# Altium PCB PCB1.PcbDoc (part 2 of 2)
Units mm, origin at the board's own origin, x right, y up, seen from the top; angles counter-clockwise.
Board outline 53 x 53 mm, 4 copper layers (Top Layer, Internal Plane 1, Signal Layer 1, Bottom Layer), stack 1.58 mm thick; 86 components, 52 nets, 310 pads, 1237 vias.
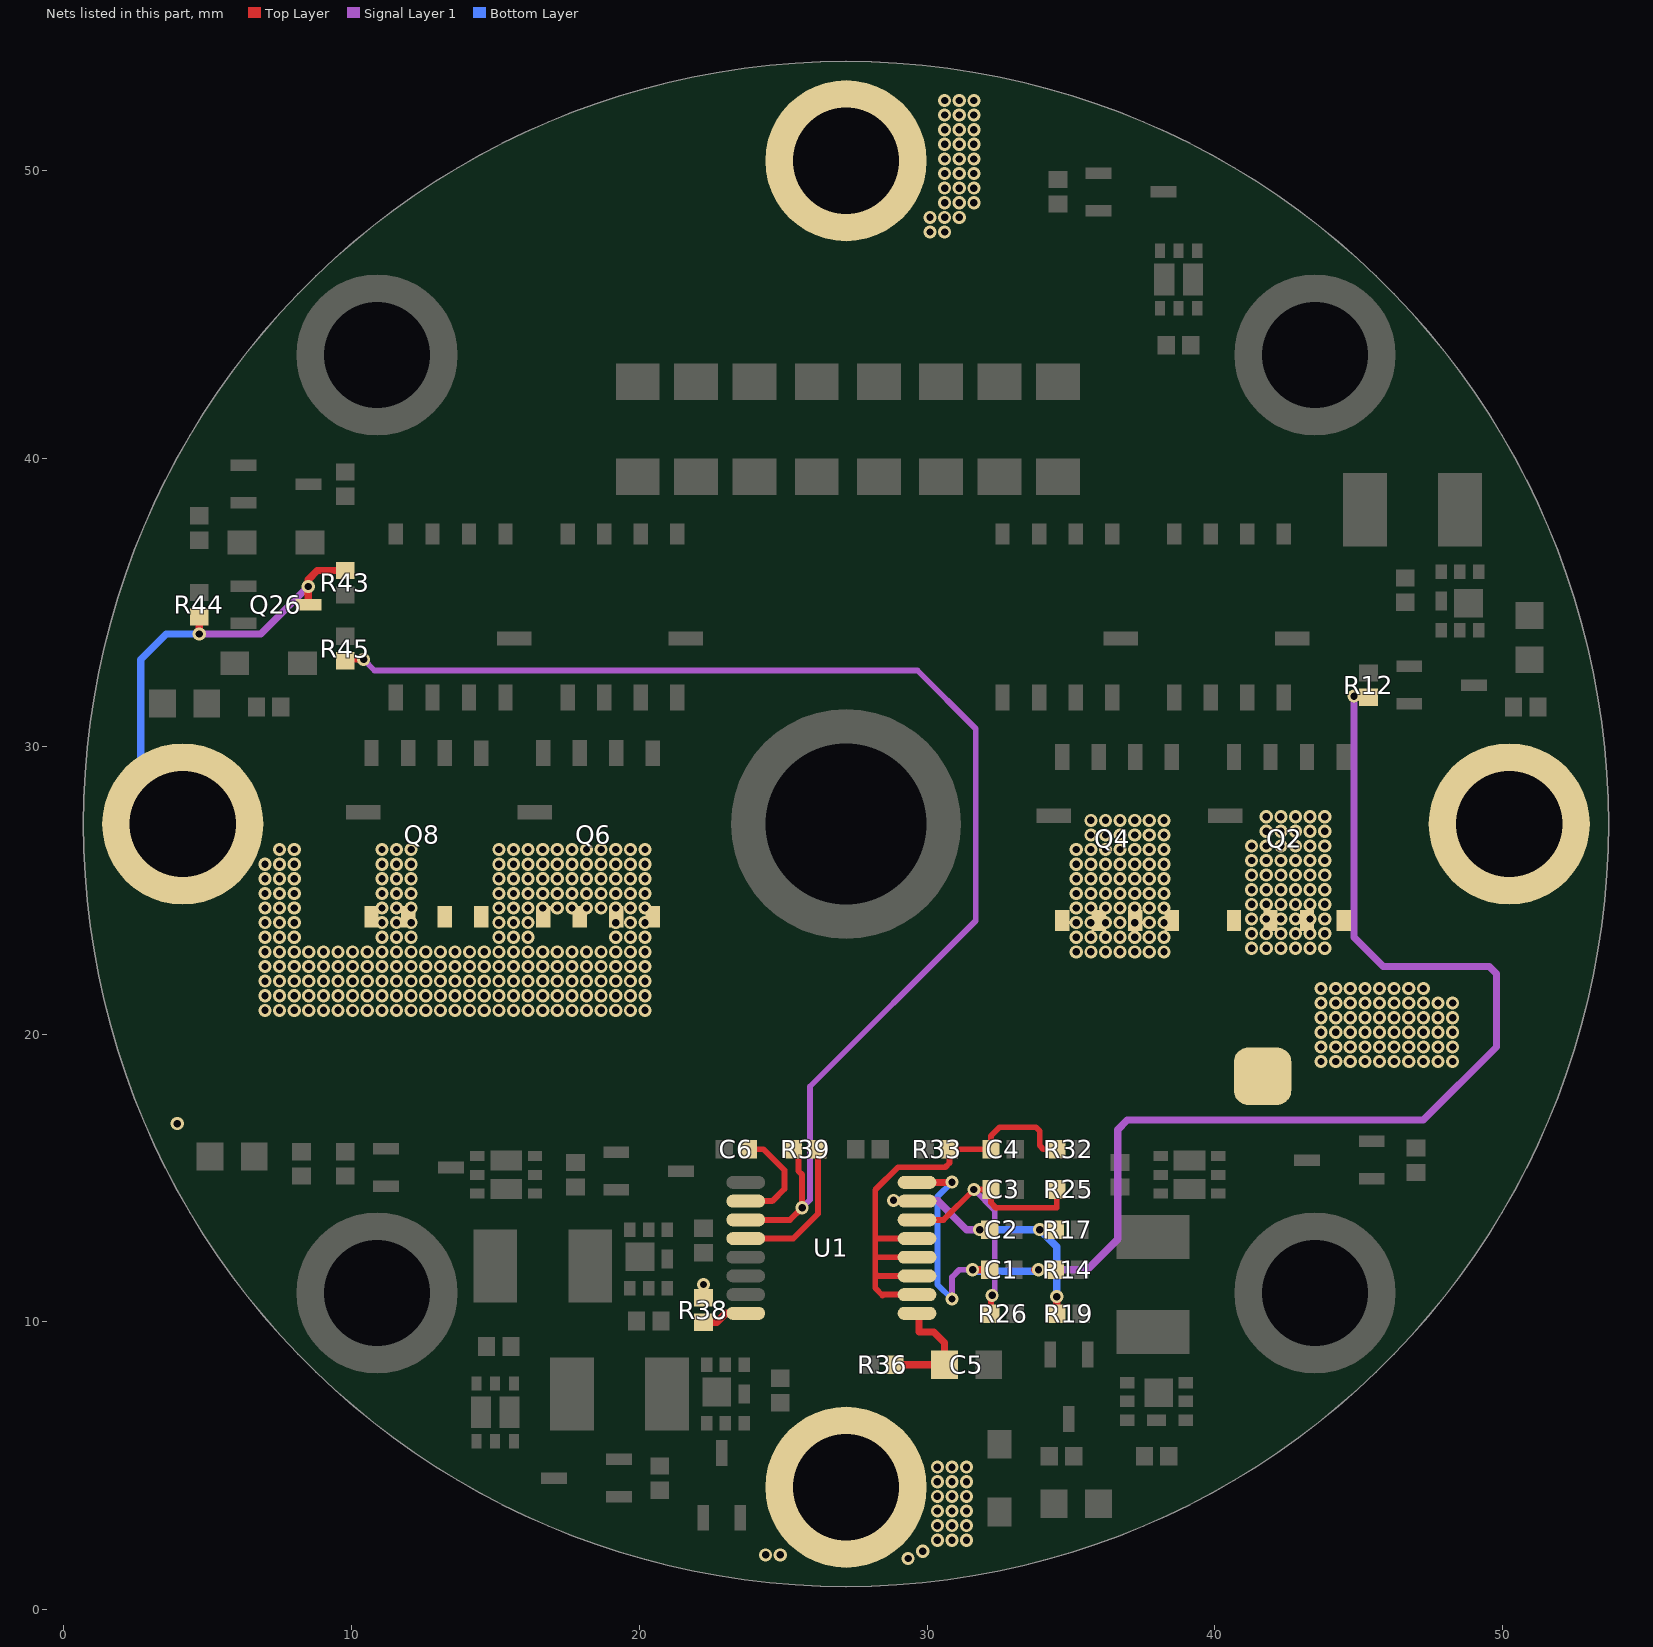
[diagram p4: the nets of this part, all layers, seen from the top]

## Via types
v1: diameter 0.457, hole 0.254, Top Layer to Bottom Layer, tented both sides, 1237 vias

## Nets (pads, with @x,y where several pads share a name; then routed paths per layer and width w, separated by ;. In a path a pad name is that pad's centre, name@x,y a point inside that pad or via, vN(x,y) a via of type N, cw(c..) or ccw(c..) an arc to the next point about the centre after c; other vN are vias at no path point) (continued)
P-: pad.1@4.128,27.305 pad.1@27.178,4.255 pad.1@27.178,50.355 pad.1@50.228,27.305 pad.2 Q2.1 Q2.2 Q2.3 Q2.4 Q4.1 Q4.2 Q4.3 Q4.4 Q6.1 Q6.2 Q6.3 Q6.4 Q8.1 Q8.2 Q8.3 Q8.4 Q26.3 R38.1 R43.2 R44.2 | length 16.5
  Top Layer w0.254: v1(4.699,33.909) R44.2@4.699,34.5 ; Q26.3@8.491,34.925 v1(8.491,35.56) 8.491,35.796 8.807,36.112 R43.2@9.779,36.112 ; R38.1@22.225,10.839 v1(22.225,11.303)
  Signal Layer 1 w0.254: v1(4.699,33.909) 6.84,33.909 v1(8.491,35.56)
  Bottom Layer w0.254: pad.1@4.128,27.305 2.667,28.766 2.667,33.02 3.556,33.909 v1(4.699,33.909)
  other v1: 29.337,1.778 24.384,1.905 24.892,1.905 29.845,2.032 30.353,2.413 30.861,2.413 31.369,2.413 30.353,2.921 30.861,2.921 31.369,2.921 30.353,3.429 30.861,3.429 31.369,3.429 30.353,3.937 30.861,3.937 31.369,3.937 30.353,4.445 30.861,4.445 31.369,4.445 30.353,4.953 30.861,4.953 31.369,4.953 3.937,16.891 43.688,19.05 44.196,19.05 44.704,19.05 45.212,19.05 45.72,19.05 46.228,19.05 46.736,19.05 47.244,19.05 47.752,19.05 48.26,19.05 43.688,19.558 44.196,19.558 44.704,19.558 45.212,19.558 45.72,19.558 46.228,19.558 46.736,19.558 47.244,19.558 47.752,19.558 48.26,19.558 43.688,20.066 44.196,20.066 44.704,20.066 45.212,20.066 45.72,20.066 46.228,20.066 46.736,20.066 47.244,20.066 47.752,20.066 47.752,20.066 48.26,20.066 43.688,20.574 44.196,20.574 44.704,20.574 45.212,20.574 45.72,20.574 46.228,20.574 46.736,20.574 47.244,20.574 47.752,20.574 48.26,20.574 6.985,20.828 7.493,20.828 8.001,20.828 8.509,20.828 9.017,20.828 9.525,20.828 10.033,20.828 10.541,20.828 11.049,20.828 11.557,20.828 12.065,20.828 12.573,20.828 13.081,20.828 13.589,20.828 14.097,20.828 14.605,20.828 15.113,20.828 15.621,20.828 16.129,20.828 16.637,20.828 17.145,20.828 17.653,20.828 18.161,20.828 18.669,20.828 19.177,20.828 19.685,20.828 20.193,20.828 43.688,21.082 44.196,21.082 44.704,21.082 45.212,21.082 45.72,21.082 46.228,21.082 46.736,21.082 47.244,21.082 47.752,21.082 48.26,21.082 6.985,21.336 7.493,21.336 8.001,21.336 8.509,21.336 9.017,21.336 9.525,21.336 10.033,21.336 10.541,21.336 11.049,21.336 11.557,21.336 12.065,21.336 12.573,21.336 13.081,21.336 13.589,21.336 14.097,21.336 14.605,21.336 15.113,21.336 15.621,21.336 16.129,21.336 16.637,21.336 17.145,21.336 17.653,21.336 18.161,21.336 18.669,21.336 19.177,21.336 19.685,21.336 20.193,21.336 43.688,21.59 44.196,21.59 44.704,21.59 45.212,21.59 45.72,21.59 46.228,21.59 46.736,21.59 47.244,21.59 6.985,21.844 7.493,21.844 8.001,21.844 8.509,21.844 9.017,21.844 9.525,21.844 10.033,21.844 10.541,21.844 11.049,21.844 11.557,21.844 12.065,21.844 12.573,21.844 13.081,21.844 13.589,21.844 14.097,21.844 14.605,21.844 15.113,21.844 15.621,21.844 16.129,21.844 16.637,21.844 17.145,21.844 17.653,21.844 18.161,21.844 18.669,21.844 19.177,21.844 19.685,21.844 20.193,21.844 6.985,22.352 7.493,22.352 8.001,22.352 8.509,22.352 9.017,22.352 9.525,22.352 10.033,22.352 10.541,22.352 11.049,22.352 11.557,22.352 12.065,22.352 12.573,22.352 13.081,22.352 13.589,22.352 14.097,22.352 14.605,22.352 15.113,22.352 15.621,22.352 16.129,22.352 16.637,22.352 17.145,22.352 17.653,22.352 18.161,22.352 18.669,22.352 19.177,22.352 19.685,22.352 20.193,22.352 6.985,22.86 7.493,22.86 8.001,22.86 8.509,22.86 9.017,22.86 9.525,22.86 10.033,22.86 10.541,22.86 11.049,22.86 11.557,22.86 12.065,22.86 12.573,22.86 13.081,22.86 13.589,22.86 14.097,22.86 14.605,22.86 15.113,22.86 15.621,22.86 16.129,22.86 16.637,22.86 17.145,22.86 17.653,22.86 18.161,22.86 18.669,22.86 19.177,22.86 19.685,22.86 20.193,22.86 35.179,22.86 35.687,22.86 36.195,22.86 36.703,22.86 37.211,22.86 37.719,22.86 38.227,22.86 41.275,22.987 41.783,22.987 42.291,22.987 42.799,22.987 43.307,22.987 43.815,22.987 6.985,23.368 7.493,23.368 8.001,23.368 11.049,23.368 11.557,23.368 12.065,23.368 15.113,23.368 15.621,23.368 16.129,23.368 19.177,23.368 19.685,23.368 20.193,23.368 35.179,23.368 35.687,23.368 36.195,23.368 36.703,23.368 37.211,23.368 37.719,23.368 38.227,23.368 41.275,23.495 41.783,23.495 42.291,23.495 42.799,23.495 43.307,23.495 43.815,23.495 6.985,23.876 7.493,23.876 8.001,23.876 11.049,23.876 11.557,23.876 12.065,23.876 15.113,23.876 15.621,23.876 16.129,23.876 19.177,23.876 19.685,23.876 20.193,23.876 35.179,23.876 35.687,23.876 36.195,23.876 36.703,23.876 37.211,23.876 37.719,23.876 38.227,23.876 41.275,24.003 41.783,24.003 42.291,24.003 42.799,24.003 43.307,24.003 43.815,24.003 6.985,24.384 7.493,24.384 8.001,24.384 11.049,24.384 11.557,24.384 12.065,24.384 15.113,24.384 15.621,24.384 16.129,24.384 16.637,24.384 17.145,24.384 17.653,24.384 18.161,24.384 18.669,24.384 19.177,24.384 19.685,24.384 20.193,24.384 35.179,24.384 35.687,24.384 36.195,24.384 36.703,24.384 37.211,24.384 37.719,24.384 38.227,24.384 41.275,24.511 41.783,24.511 42.291,24.511 42.799,24.511 43.307,24.511 43.815,24.511 6.985,24.892 7.493,24.892 8.001,24.892 11.049,24.892 11.557,24.892 12.065,24.892 15.113,24.892 15.621,24.892 16.129,24.892 16.637,24.892 17.145,24.892 17.653,24.892 18.161,24.892 18.669,24.892 19.177,24.892 19.685,24.892 20.193,24.892 35.179,24.892 35.687,24.892 36.195,24.892 36.703,24.892 37.211,24.892 37.719,24.892 38.227,24.892 41.275,25.019 41.783,25.019 42.291,25.019 42.799,25.019 43.307,25.019 43.815,25.019 6.985,25.4 7.493,25.4 8.001,25.4 11.049,25.4 11.557,25.4 12.065,25.4 15.113,25.4 15.621,25.4 16.129,25.4 16.637,25.4 17.145,25.4 17.653,25.4 18.161,25.4 18.669,25.4 19.177,25.4 19.685,25.4 20.193,25.4 35.179,25.4 35.687,25.4 36.195,25.4 36.703,25.4 37.211,25.4 37.719,25.4 38.227,25.4 41.275,25.527 41.783,25.527 42.291,25.527 42.799,25.527 43.307,25.527 43.815,25.527 6.985,25.908 7.493,25.908 8.001,25.908 11.049,25.908 11.557,25.908 12.065,25.908 15.113,25.908 15.621,25.908 16.129,25.908 16.637,25.908 17.145,25.908 17.653,25.908 18.161,25.908 18.669,25.908 19.177,25.908 19.685,25.908 20.193,25.908 35.179,25.908 35.687,25.908 36.195,25.908 36.703,25.908 37.211,25.908 37.719,25.908 38.227,25.908 41.275,26.035 41.783,26.035 42.291,26.035 42.799,26.035 43.307,26.035 43.815,26.035 7.493,26.416 8.001,26.416 11.049,26.416 11.557,26.416 12.065,26.416 15.113,26.416 15.621,26.416 16.129,26.416 16.637,26.416 17.145,26.416 17.653,26.416 18.161,26.416 18.669,26.416 19.177,26.416 19.685,26.416 20.193,26.416 35.179,26.416 35.687,26.416 36.195,26.416 36.703,26.416 37.211,26.416 37.719,26.416 38.227,26.416 41.275,26.543 41.783,26.543 42.291,26.543 42.799,26.543 43.307,26.543 43.815,26.543 35.687,26.924 36.195,26.924 36.703,26.924 36.703,26.924 37.211,26.924 37.719,26.924 38.227,26.924 41.783,27.051 42.291,27.051 42.799,27.051 42.799,27.051 43.307,27.051 43.815,27.051 35.687,27.432 36.195,27.432 36.703,27.432 37.211,27.432 37.719,27.432 38.227,27.432 41.783,27.559 42.291,27.559 42.799,27.559 43.307,27.559 43.815,27.559 30.099,47.879 30.607,47.879 30.099,48.387 30.607,48.387 31.115,48.387 30.607,48.895 31.115,48.895 31.623,48.895 30.607,49.403 31.115,49.403 31.623,49.403 30.607,49.911 31.115,49.911 31.623,49.911 30.607,50.419 31.115,50.419 31.623,50.419 30.607,50.927 31.115,50.927 31.623,50.927 30.607,51.435 31.115,51.435 31.623,51.435 30.607,51.943 31.115,51.943 31.623,51.943 30.607,52.451 31.115,52.451 31.623,52.451
RTS: R39.1 R45.2 U1.11 | length 46.3
  Top Layer w0.203: R45.2@9.779,33.02 v1(10.414,33.02) ; U1.11@23.695,13.548 25.232,13.548 v1(25.654,13.97) 25.654,15.113 25.527,15.24 25.527,15.831 R39.1@25.356,16.002
  Signal Layer 1 w0.203: v1(10.414,33.02) 10.795,32.639 29.666,32.639 31.689,30.616 31.689,23.942 25.928,18.181 25.928,14.244 v1(25.654,13.97)
RTV: R39.2 U1.12 | length 5.1
  Top Layer w0.203: U1.12@23.695,12.898 25.344,12.898 26.206,13.76 R39.2@26.206,16.002
TEC: C6.2 U1.10 | length 3.7
  Top Layer w0.203: U1.10@23.695,14.198 24.612,14.198 25.039,14.625 25.039,15.27 24.307,16.002 C6.2@23.793,16.002
VC1: C4.2 R32.1 R33.1 U1.2 U1.3 U1.4 U1.5 | length 17.8
  Top Layer w0.203: U1.2@29.645,10.948 28.474,10.948 28.448,10.922 28.194,11.176 28.194,11.684 ; U1.3@29.645,11.598 28.28,11.598 28.194,11.684 ; U1.4@29.645,12.248 28.25,12.248 28.194,12.192 ; U1.5@29.645,12.898 28.25,12.898 28.194,12.954 ; R32.1@34.5,16.002 34.036,16.002 33.909,16.129 33.909,16.637 33.782,16.764 32.512,16.764 32.214,16.466 C4.2@32.214,16.002 R33.1@30.778,16.002 30.778,15.523 30.632,15.377 28.982,15.377 28.194,14.589 28.194,12.954 ; 28.194,11.684 28.194,12.192 ; 28.194,12.192 28.194,12.954
VC2: C3.2 R25.1 R26.1 U1.6 | length 11.1
  Top Layer w0.203: U1.6@29.645,13.548 30.566,13.548 v1(31.623,14.605) C3.2@32.214,14.605 32.214,14.141 32.385,13.97 34.5,13.97 R25.1@34.5,14.605 ; R26.1@32.214,10.287 32.214,10.878 v1(32.258,10.922)
  Signal Layer 1 w0.203: v1(31.623,14.605) 32.349,13.879 32.349,11.013 v1(32.258,10.922)
VC3: C2.2 R17.1 R19.1 U1.7 | length 10.1
  Top Layer w0.254: v1(28.829,14.224) 28.855,14.198 U1.7@29.645,14.198 ; v1(33.909,13.208) R17.1@34.456,13.208 ; R19.1@34.5,10.287 v1(34.5,10.878) v1@34.544,10.922
  Signal Layer 1 w0.254: v1(28.829,14.224) 30.353,14.224 31.369,13.208 v1(31.821,13.208)
  Bottom Layer w0.254: v1(31.821,13.208) v1(33.909,13.208) 34.5,12.617 v1(34.5,10.878)
VC4: C1.2 R12.1 R14.1 U1.8 | length 49.2
  Top Layer w0.254: U1.8@29.645,14.848 30.85,14.848 v1(30.861,14.859) ; v1(31.579,11.811) C1.2@32.17,11.811 ; v1@33.738,11.811 R14.1@34.456,11.811 ; v1(44.831,31.75) 44.875,31.706 R12.1@45.339,31.706
  Signal Layer 1 w0.203: v1(30.861,10.795) 30.861,11.557 31.115,11.811 v1(31.579,11.811)
  Signal Layer 1 w0.254: v1(33.865,11.811) 35.56,11.811 36.622,12.873 36.622,16.683 36.957,17.018 47.244,17.018 49.784,19.558 49.784,22.098 49.53,22.352 45.847,22.352 44.831,23.368 v1(44.831,31.75)
  Bottom Layer w0.203: v1(30.861,10.795) 30.353,11.303 30.353,14.351 v1(30.861,14.859)
  Bottom Layer w0.254: v1(31.579,11.811) 31.625,11.765 33.819,11.765 v1(33.865,11.811)
VCC: C5.2 R36.2 U1.1 | length 4.2
  Top Layer w0.254: R36.2@28.873,8.509 C5.2@30.599,8.509 30.599,9.279 30.226,9.652 29.718,9.652 29.718,10.225 U1.1@29.645,10.298
VM: R38.2 U1.16 | length 1.6
  Top Layer w0.254: R38.2@22.225,9.989 22.689,9.989 22.998,10.298 U1.16@23.695,10.298

## Polygon pours and split planes (outlines as drawn)
CELL4 on Top Layer "Component Side-No Net 1" (solid, remove dead copper, pour order 156): 31.75,33.147 31.75,23.876 30.861,22.987 30.607,22.733 24.257,22.733 22.84,24.15 22.733,24.257 22.733,33.274 31.75,33.274
P- on Top Layer "Component Side-No Net 1" (solid, remove dead copper, pour order 155): 44.958,25.146 45.339,25.781 45.339,30.734 49.69,30.734 49.765,30.809 51.054,29.52 51.054,22.606
NetQ5_5 on Top Layer "Component Side-No Net 1" (solid, remove dead copper, pour order 154): 10.033,28.696 22.6,28.696 22.606,28.702 22.606,32.258 10.481,32.258 9.994,31.771
NetQ1_5 on Top Layer "Component Side-No Net 1" (solid, remove dead copper, pour order 153): 32.131,32.639 43.815,32.639 43.942,32.512 43.838,32.408 43.838,30.965 44.196,30.607 45.212,30.607 45.212,28.194 45.085,28.321 32.131,28.321
GND on Top Layer "Component Side-No Net 1" (solid, remove dead copper, pour order 152): 61.595,27.686 49.784,27.686 47.117,30.353 46.863,30.607 44.196,30.607 43.815,30.988 43.815,34.544 42.545,34.544 42.418,34.671 42.037,35.052 35.56,35.052 35.56,41.656 35.179,42.037 34.29,42.926 29.972,42.926 29.972,56.642 31.623,58.293 31.75,58.42 67.691,58.42
GND on Top Layer "Component Side-No Net 1" (solid, remove dead copper, pour order 151): -1.651,48.895 0.127,47.117 13.589,47.117 13.589,41.275 12.573,40.259 12.319,40.005 -4.953,40.005
P- on Top Layer "Component Side-No Net 1" (solid, remove dead copper, pour order 150): -3.175,43.18 -1.397,41.402 11.684,41.402 11.684,33.909 10.922,33.147 10.541,32.766 10.541,31.496 10.541,30.607 10.033,30.099 10.033,26.797 -2.921,30.099 -3.175,30.353
P- on Top Layer "Component Side-No Net 1" (solid, remove dead copper, pour order 149): 41.656,18.923 41.656,13.97 42.291,13.335 54.864,13.335 54.864,17.145 58.293,20.574
P- on Top Layer "Component Side-No Net 1" (solid, remove dead copper, pour order 93): -1.143,18.034 -1.016,17.907 53.721,17.907 53.721,4.191 51.308,1.778 44.323,-5.207 0.127,-5.207
GND on Top Layer "Component Side-No Net 1" (solid, remove dead copper, pour order 95): -6.731,19.304 60.325,19.304 61.849,17.78 61.468,17.399 61.468,-3.556 -13.462,-3.556 -15.494,-5.588
P- on Top Layer "Component Side-No Net 1" (solid, remove dead copper, pour order 148): 32.385,54.864 32.385,46.99 32.258,46.863 24.257,46.863 24.257,47.498 22.987,48.768 22.987,55.118
P- on Top Layer "Component Side-No Net 1" (solid, remove dead copper, pour order 139): 23.876,-0.508 24.13,-0.254 24.13,7.493 30.226,7.493 31.967,5.752 32.004,5.715 32.004,-0.762
16V8 on Top Layer "Component Side-No Net 1" (solid, remove dead copper, pour order 138): 13.97,9.948 14.257,10.235 17.272,10.235 16.891,10.616 16.891,14.097 16.891,14.59 16.368,15.113 12.319,15.113 12.319,13.97 12.192,13.843 12.954,13.081 12.954,12.954
12V on Top Layer "Component Side-No Net 1" (solid, remove dead copper, pour order 137): 16.764,10.033 18.161,10.033 18.542,10.414 20.193,10.414 20.193,8.197 20.066,8.07 20.066,7.874 18.669,7.874 18.034,7.239 17.78,7.493 17.653,7.493
BALDN1 on Top Layer "Component Side-No Net 1" (solid, remove dead copper, pour order 136): 17.272,13.843 20.701,13.843 20.574,13.716 20.574,10.795 20.574,10.527 20.643,10.458 20.599,10.414 18.542,10.414 18.542,10.033 17.272,10.033
12V on Top Layer "Component Side-No Net 1" (solid, remove dead copper, pour order 133): 20.701,11.811 21.717,11.811 21.717,14.224 21.59,14.351 20.701,14.351
NetQ21_1 on Top Layer "Component Side-No Net 1" (solid, remove dead copper, pour order 130): 16.129,14.859 17.018,14.859 17.145,14.986 18.161,14.986 18.161,13.843 16.129,13.843
NetQ21_1 on Top Layer "Component Side-No Net 1" (solid, remove dead copper, pour order 129): 12.954,15.621 14.732,15.621 14.732,17.018 12.954,17.018
CELL4 on Top Layer "Component Side-No Net 1" (solid, remove dead copper, pour order 128): 14.732,15.24 14.732,17.018 16.764,17.018 16.764,15.367 16.002,15.367 16.002,15.24
12V on Top Layer "Component Side-No Net 1" (solid, remove dead copper, pour order 126): 15.113,7.493 16.51,7.493 16.637,7.62 16.764,7.747 16.764,10.033 18.542,10.033 18.542,5.969 18.542,5.207 15.748,5.207 15.48,5.207 15.118,5.569
NetQ20_3 on Top Layer "Component Side-No Net 1" (solid, remove dead copper, pour order 125): 23.241,6.096 23.241,9.271 23.368,9.398 20.574,9.398 20.066,9.398 20.066,6.096
7V4 on Top Layer "Component Side-No Net 1" (solid, remove dead copper, pour order 124): 25.781,7.747 24.13,7.747 24.13,6.985 23.368,6.985 23.368,9.398 25.019,9.398
7V4 on Top Layer "Component Side-No Net 1" (solid, remove dead copper, pour order 123): 24.511,7.747 26.416,7.747 26.67,8.001 26.67,9.398 24.638,9.398 24.511,9.271
NetQ17_1 on Top Layer "Component Side-No Net 1" (solid, remove dead copper, pour order 120): 15.367,7.62 15.367,8.509 15.367,8.636 15.24,8.763 15.24,9.652 16.637,9.652 16.637,7.62
NetQ17_1 on Top Layer "Component Side-No Net 1" (solid, remove dead copper, pour order 119): 13.589,6.223 14.605,6.223 14.605,5.461 14.986,5.461 15.875,4.572 16.002,4.445 16.002,2.54 10.668,2.54 10.16,3.048
CELL3 on Top Layer "Component Side-No Net 1" (solid, remove dead copper, pour order 118): 4.572,14.097 12.319,14.097 13.97,12.446 13.97,8.382 14.097,8.255 14.351,8.255 14.732,8.255 14.732,7.493 14.859,7.493 14.859,6.223 13.962,6.223 12.79,5.051 12.565,4.826 7.747,4.826
7V4 on Top Layer "Component Side-No Net 1" (solid, remove dead copper, pour order 116): 35.941,12.065 35.941,10.795 37.846,10.795 37.973,10.795 38.1,10.922 38.1,12.573 35.941,12.573
NetQ16_3 on Top Layer "Component Side-No Net 1" (solid, remove dead copper, pour order 115): 36.449,10.541 39.243,10.541 39.243,6.985 36.449,6.985
3V7 on Top Layer "Component Side-No Net 1" (solid, remove dead copper, pour order 112): 37.592,6.858 37.592,5.969 37.719,5.842 37.973,5.842 37.973,3.429 38.1,3.302 38.481,2.921 38.481,2.286 42.545,2.286 43.307,3.048 41.783,4.572 40.132,4.572 40.132,6.731 40.005,6.858
7V4 on Top Layer "Component Side-No Net 1" (solid, remove dead copper, pour order 111): 39.864,14.097 39.497,14.097 39.497,12.065 35.941,12.065 35.941,13.97 36.322,14.351 36.81,14.839 37.043,14.839 38.207,14.839 38.354,14.986 38.481,15.113 39.902,15.113
NetQ13_1 on Top Layer "Component Side-No Net 1" (solid, remove dead copper, pour order 108): 38.354,15.494 37.211,15.494 37.211,17.018 37.338,17.145 37.39,17.197 38.354,17.197
NetQ13_1 on Top Layer "Component Side-No Net 1" (solid, remove dead copper, pour order 107): 39.751,14.732 40.767,14.732 40.767,12.446 39.751,12.446
CELL2 on Top Layer "Component Side-No Net 1" (solid, remove dead copper, pour order 106): 45.339,7.493 42.037,7.493 40.64,8.89 40.64,12.573 40.64,15.367 39.878,15.367 39.751,15.367 39.624,15.24 38.608,15.24 38.481,15.367 38.481,17.526 42.164,17.526 42.291,17.399 42.291,17.018 42.545,16.764 42.545,14.732 42.545,14.605 42.799,14.351 42.926,14.224 45.847,14.224 50.927,14.224 51.816,13.335 51.816,6.604
NetQ12_3 on Top Layer "Component Side-No Net 1" (solid, remove dead copper, pour order 104): 47.625,39.624 47.627,39.626 50.653,39.626 51.56,39.626 52.07,39.116 52.324,38.862 52.324,36.195 52.324,35.814 52.451,35.687 49.911,35.687 49.657,35.433 49.53,35.306 49.53,33.782 48.26,33.782 48.26,36.322 48.006,36.576 47.625,36.576
GND on Top Layer "Component Side-No Net 1" (solid, remove dead copper, pour order 103): 46.101,35.433 47.244,35.433 47.371,35.56 48.133,35.56 48.133,33.655 48.133,33.147 44.831,33.147 44.323,33.147 44.323,34.925 46.101,34.925
3V7 on Top Layer "Component Side-No Net 1" (solid, remove dead copper, pour order 102): 45.974,39.624 45.974,35.179 44.323,35.179 44.323,39.624
3V7 on Top Layer "Component Side-No Net 1" (solid, remove dead copper, pour order 100): 38.608,45.593 38.608,46.736 38.608,46.863 38.227,46.863 38.227,47.879 36.322,47.879 35.814,47.879 35.814,45.593
NetQ9_1 on Top Layer "Component Side-No Net 1" (solid, remove dead copper, pour order 98): 38.354,45.466 38.354,44.704 38.735,44.323 38.735,43.561 37.338,43.561 37.338,45.466
NetQ9_1 on Top Layer "Component Side-No Net 1" (solid, remove dead copper, pour order 97): 39.116,46.99 40.513,46.99 40.513,48.514 39.116,48.514
CELL1 on Top Layer "Component Side-No Net 1" (solid, remove dead copper, pour order 96): 38.862,46.736 38.862,45.593 39.116,45.593 39.21,45.499 39.21,45.054 39.21,44.864 39.37,44.704 39.751,44.704 39.751,41.529 40.259,41.021 40.64,40.64 44.577,40.64 44.704,40.64 48.641,44.577 48.641,47.117 48.514,47.244 48.133,46.863 39.624,46.863 38.862,46.863
IS on Top Layer "Component Side-No Net 1" (solid, remove dead copper, pour order 94): 11.176,33.274 11.176,39.243 11.176,40.259 11.303,40.132 22.606,40.132 42.291,40.132 42.672,39.751 42.672,35.052 42.672,34.426 42.648,34.402 42.633,34.417 37.846,34.417 35.644,34.417 35.629,34.402 35.629,33.452 23.317,33.452 22.352,34.417 22.337,34.402 20.516,34.402 20.516,33.452 17.256,33.452 17.256,34.401 17.272,34.417 17.257,34.402 14.547,34.402 14.547,33.343 14.478,33.274
GND on Top Layer "Component Side-No Net 1" (solid, remove dead copper, pour order 92): 8.001,45.847 8.001,42.164 8.001,42.037 9.271,40.767 9.398,40.64 12.446,40.64 35.179,40.64 35.433,40.894 35.433,46.99 35.179,47.244 29.083,47.244 25.146,47.244 23.876,48.514 23.876,54.229 8.382,54.229 8.255,54.356
P- on Top Layer "Component Side-No Net 1" (solid, remove dead copper, pour order 91): 41.46,27.889 47.676,27.889 47.752,27.813 48.006,27.559 48.006,22.225 42.291,22.225 41.529,21.463
P- on Top Layer "Component Side-No Net 1" (solid, remove dead copper, pour order 90): 22.84,24.15 22.84,26.944 21.717,28.067 18.415,28.067 18.161,28.067 18.034,27.94 17.907,27.813 17.907,25.146 17.907,20.32 17.78,20.193 18.542,19.431 22.606,19.431
P- on Top Layer "Component Side-No Net 1" (solid, remove dead copper, pour order 89): 0.889,30.226 6.223,30.226 8.763,30.226 9.398,29.591 9.525,29.464 9.525,27.178 11.376,27.178 11.6,27.178 19.812,27.178 22.098,27.178 22.479,26.797 22.733,26.543 22.733,25.146 22.733,24.257 23.495,23.495 24.257,22.733 30.734,22.733 30.988,22.733 31.75,23.368 31.75,23.876 31.75,26.924 32.258,26.924 32.639,26.924 45.72,26.924 45.847,26.924 47.117,28.194 47.117,29.718 47.117,30.353 47.371,30.607 56.388,30.607 56.388,17.78 55.753,17.145 55.499,17.399 41.402,17.399 -1.778,17.399 -2.921,18.542 -2.667,18.796 -2.667,29.591
12V on Bottom Layer "Component Side-No Net 1" (solid, remove dead copper, pour order 173): 21.717,12.192 21.717,16.891 21.844,17.018 17.78,17.018 17.78,12.446 17.907,12.319 17.907,12.192
7V4 on Bottom Layer "Component Side-No Net 1" (solid, remove dead copper, pour order 114): 24.13,12.192 37.592,12.192 37.719,12.065 38.227,11.557 38.227,7.62 31.877,7.62 31.369,7.112 31.242,7.239 23.368,7.239
NetQ5_5 on Bottom Layer "Component Side-No Net 1" (solid, remove dead copper, pour order 169): 8.763,27.432 23.622,27.432 23.749,27.559 23.622,27.686 23.622,33.782 9.144,33.782 9.017,33.909
P- on Bottom Layer "Component Side-No Net 1" (solid, remove dead copper, pour order 168): 22.352,27.888 22.225,28.015 22.225,34.036 47.371,34.036 49.276,32.131 48.514,31.369 48.514,25.019 47.752,25.019 46.355,23.622 21.336,23.622
3V7 on Bottom Layer "Component Side-No Net 1" (solid, remove dead copper, pour order 167): 44.45,37.338 46.609,37.338 46.482,37.211 46.482,34.798 44.196,34.798 44.069,34.925
GND on Bottom Layer "Component Side-No Net 1" (solid, remove dead copper, pour order 166): -2.286,30.988 -1.686,31.588 10.688,31.588 10.795,31.695 10.795,33.02 11.049,33.02 11.303,33.274 11.43,33.401 11.43,40.005 36.393,40.005 42.672,33.726 45.212,31.186 45.212,30.585 55.604,30.585 56.388,31.369 54.356,33.401 54.356,61.087 3.937,61.087 0.635,64.389 -6.604,57.15 -6.731,57.15
P- on Bottom Layer "Component Side-No Net 1" (solid, remove dead copper, pour order 165): -7.62,34.417 6.477,34.417 8.763,32.131 9.017,31.877 10.414,31.877 36.576,31.877 40.386,28.067 40.513,28.194 42.672,28.194 44.577,28.194 44.704,28.067 45.085,28.448 45.085,30.458 45.212,30.585 45.234,30.607 63.246,30.607 63.246,17.018 64.262,16.002 64.135,15.875 -21.59,15.875
CELL4 on Bottom Layer "Component Side-No Net 1" (solid, remove dead copper, pour order 164): 22.352,31.496 23.241,32.385 31.369,32.385 32.258,31.496 32.258,28.194 31.877,27.813 31.75,27.686 31.75,23.876 31.75,23.749 30.861,22.86 30.734,22.987 24.384,22.987 24.257,22.987 22.987,24.257 22.987,26.924 22.987,27.559 22.352,28.194
IS on Bottom Layer "Component Side-No Net 1" (solid, remove dead copper, pour order 163): 11.176,40.132 42.545,40.132 42.672,40.005 42.672,39.497 42.672,33.5 42.464,33.293 42.192,33.02 39.37,33.02 32.639,33.02 32.512,32.893 32.131,33.274 11.303,33.274 10.414,34.163 10.414,37.592 10.287,37.719 10.287,40.005 10.414,40.005 10.541,40.132
P- on Bottom Layer "Component Side-No Net 1" (solid, remove dead copper, pour order 162): 23.876,54.864 23.876,48.768 25.273,47.371 30.988,47.371 31.877,48.26 32.004,48.387 32.004,56.515
GND on Bottom Layer "Component Side-No Net 1" (solid, remove dead copper, pour order 159): -5.842,20.447 60.071,20.447 61.722,18.796 59.563,16.637 59.563,-1.651 -1.778,-1.651 -2.54,-0.889
P- on Bottom Layer "Component Side-No Net 1" (solid, remove dead copper, pour order 158): 31.877,-1.651 31.877,6.477 31.75,6.604 30.999,7.355 24.881,7.355 23.876,6.35 23.876,-1.524
P- on Bottom Layer "Component Side-No Net 1" (solid, remove dead copper, pour order 157): 48.133,30.734 48.006,30.607 45.212,30.607 45.212,28.575 44.831,28.194 42.672,28.194 42.672,22.733 43.053,22.352 43.18,22.479 48.895,22.479
12V on Bottom Layer "Component Side-No Net 1" (solid, remove dead copper, pour order 135): 17.78,10.033 18.796,10.033 19.558,9.271 19.558,7.874 18.669,7.874 18.161,7.366 16.764,7.366 16.764,10.033
12V on Bottom Layer "Component Side-No Net 1" (solid, remove dead copper, pour order 134): 21.844,14.224 21.844,12.065 21.209,12.065 19.558,12.065 19.558,10.287 19.558,7.874 18.542,7.874 18.415,7.874 18.542,8.001 18.542,13.335 18.542,13.843 18.669,13.97 18.923,14.224
3V7 on Bottom Layer "Component Side-No Net 1" (solid, remove dead copper, pour order 127): 37.973,11.811 34.671,11.811 34.671,14.478 35.052,14.859 36.068,14.859 36.122,14.805 38.027,14.805
7V4 on Bottom Layer "Component Side-No Net 1" (solid, remove dead copper, pour order 122): 34.925,9.652 25.019,9.652 25.019,7.874 34.163,7.874 34.671,7.874 35.052,8.255 35.56,8.763 35.56,9.652
7V4 on Bottom Layer "Component Side-No Net 1" (solid, remove dead copper, pour order 117): 37.519,11.865 37.465,11.811 35.814,11.811 35.814,9.906 35.56,9.652 34.417,9.652 34.417,8.255 37.211,8.255 37.465,8.509 37.613,8.657 37.613,11.723
3V7 on Bottom Layer "Component Side-No Net 1" (solid, remove dead copper, pour order 113): 37.465,13.843 37.465,9.652 38.481,8.636 38.862,8.255 38.862,5.334 38.862,3.048 39.751,3.048 40.132,3.429 40.132,6.604 40.132,12.827 39.243,13.716 39.243,14.805 37.647,14.805 37.553,14.711
3V7 on Bottom Layer "Component Side-No Net 1" (solid, remove dead copper, pour order 110): 48.514,15.494 48.514,15.24 49.53,15.24 49.53,17.78 49.149,18.161 48.895,18.415 44.45,18.415 35.814,18.415 35.56,18.161 35.56,16.51 35.56,14.732 35.56,13.843 35.814,13.716 37.973,13.716 37.973,12.573 39.243,12.573 39.243,14.805 38.862,15.186 38.862,15.24 38.354,15.24 38.227,15.367 38.227,16.637 48.26,16.637 48.514,16.383
NetQ13_1 on Bottom Layer "Component Side-No Net 1" (solid, remove dead copper, pour order 109): 36.576,15.24 38.862,15.24 38.989,15.113 39.243,14.859 39.243,12.573 40.386,12.573 40.386,14.478 40.386,16.891 40.259,17.018 36.957,17.018 36.576,16.637
NetQ9_1 on Bottom Layer "Component Side-No Net 1" (solid, remove dead copper, pour order 99): 37.338,43.815 38.354,43.815 38.354,45.466 40.005,45.466 40.386,45.847 40.513,45.974 40.513,48.514 39.497,48.514 39.497,47.498 39.497,47.244 39.243,46.99 38.227,46.99 37.465,46.99 37.338,46.863
GND on Signal Layer 1 "Component Side-No Net 1" (solid, remove dead copper, pour order 172): -3.175,57.785 57.404,57.785 57.531,57.658 60.198,54.991 60.198,1.651 46.863,1.651 36.957,-8.255 36.703,-8.509 -5.715,-8.509
CELL4 on Signal Layer 1 "Component Side-No Net 1" (solid, remove dead copper, pour order 171): 20.701,21.844 32.385,21.844 33.528,22.987 33.274,23.241 33.274,31.75 32.131,31.75 30.734,33.147 30.48,32.893 21.082,32.893
NetQ5_5 on Signal Layer 1 "Component Side-No Net 1" (solid, remove dead copper, pour order 170): 10.668,29.845 10.795,29.972 10.795,32.639 21.971,32.639 22.098,32.512 22.098,29.591 22.098,29.337 21.844,29.083 21.509,28.748 11.557,28.748
IS on Signal Layer 1 "Component Side-No Net 1" (solid, remove dead copper, pour order 161): 28.321,40.132 28.321,34.204 28.194,34.331 11.303,34.331 10.795,34.839 10.795,40.132
P- on Signal Layer 1 "Component Side-No Net 1" (solid, remove dead copper, pour order 160): 44.831,27.813 41.656,27.813 41.021,27.813 41.021,22.86 41.021,18.923 42.926,17.018 47.498,17.018 47.498,17.272 49.784,19.558 49.784,22.098 49.53,22.352 45.847,22.352 44.831,23.368
CELL3 on Signal Layer 1 "Component Side-No Net 1" (solid, remove dead copper, pour order 147): 0,14.986 19.584,14.986 20.91,13.66 19.685,12.435 19.685,-2.54 -2.921,-2.54 -7.239,1.778
NetQ21_1 on Signal Layer 1 "Component Side-No Net 1" (solid, remove dead copper, pour order 146): 17.399,14.732 17.399,11.045 16.814,10.46 16.514,10.16 12.573,10.16 12.573,15.113 12.446,15.24 12.739,15.533 16.616,15.533
7V4 on Signal Layer 1 "Component Side-No Net 1" (solid, remove dead copper, pour order 145): 24.765,7.366 25.019,7.62 27.559,7.62 27.559,10.033 27.051,10.541 24.511,10.541
12V on Signal Layer 1 "Component Side-No Net 1" (solid, remove dead copper, pour order 144): 17.018,12.827 17.018,6.858 17.653,6.223 17.78,6.35 25.4,6.35 25.4,12.573 23.749,17.145
P- on Signal Layer 1 "Component Side-No Net 1" (solid, remove dead copper, pour order 143): 20.828,1.27 23.368,-1.27 26.924,-1.27 26.924,23.749 22.733,27.94 22.606,28.067 14.097,28.067 8.255,28.067 5.969,30.353 5.715,30.353 -3.556,30.353 -3.556,9.906 -6.35,7.112 -3.048,3.81 -3.048,-4.699
P- on Signal Layer 1 "Component Side-No Net 1" (solid, remove dead copper, pour order 142): 64.008,30.734 64.008,30.607 45.72,30.607 46.863,29.464 46.863,5.461 66.167,5.461 67.437,6.731
P- on Signal Layer 1 "Component Side-No Net 1" (solid, remove dead copper, pour order 141): 23.876,55.499 23.876,48.514 25.019,47.371 25.146,47.244 32.385,47.244 32.385,56.261
P- on Signal Layer 1 "Component Side-No Net 1" (solid, remove dead copper, pour order 140): 32.131,-0.635 32.131,5.842 30.607,5.842 29.094,7.355 25.262,7.355 24.188,6.281 24.13,6.223 24.13,0.254
CELL4 on Signal Layer 1 "Component Side-No Net 1" (solid, remove dead copper, pour order 132): 14.657,17.018 14.784,16.891 22.86,16.891 22.86,30.226 23.749,31.115 24.257,31.623 29.718,31.623 30.099,31.623 31.242,30.48 31.242,27.686 31.242,24.892 30.353,24.003 29.464,23.114 26.543,23.114 25.4,23.114 25.019,22.733 25.019,16.002 24.638,15.621 24.241,15.224 14.716,15.224
NetQ21_1 on Signal Layer 1 "Component Side-No Net 1" (solid, remove dead copper, pour order 131): 13.335,17.018 14.859,17.018 14.859,15.24 18.161,15.24 18.288,15.113 18.288,13.97 18.161,13.843 16.002,13.843 13.462,13.843 13.335,13.97
NetQ17_1 on Signal Layer 1 "Component Side-No Net 1" (solid, remove dead copper, pour order 121): 13.081,3.81 13.081,6.223 13.843,6.985 15.621,8.763 15.621,9.652 16.637,9.652 16.637,7.62 16.256,7.239 15.494,6.477 15.494,5.461 15.494,2.921 15.24,2.667
3V7 on Signal Layer 1 "Component Side-No Net 1" (solid, remove dead copper, pour order 105): 44.831,36.83 47.625,36.83 47.752,36.703 47.752,35.814 47.752,30.988 47.128,25.008 47.752,24.384 48.006,24.13 55.626,24.13 55.626,14.859 55.88,14.605 55.753,14.732 48.26,14.732 48.26,17.78 48.133,17.907 49.784,19.558 49.784,22.098 49.53,22.352 45.72,22.352 45.593,22.479 44.831,23.241 44.831,30.353
3V7 on Signal Layer 1 "Component Side-No Net 1" (solid, remove dead copper, pour order 101): 35.941,47.117 36.83,47.117 36.83,42.037 37.846,41.021 38.354,40.513 41.783,40.513 45.593,40.513 45.847,40.259 45.974,40.132 45.974,37.973 45.974,37.719 45.974,35.179 44.831,35.179 44.831,38.735 44.831,39.243 44.704,39.37 42.799,39.37 37.719,39.37 35.687,41.402 35.56,41.529 35.56,47.117
IS on Internal Plane 1 (split plane): 42.67,38.427 42.67,32.26 32.693,32.26 31.879,33.074 31.879,38.86 42.237,38.86
IS on Internal Plane 1 (split plane): 25.779,34.979 23.314,32.514 11.305,32.514 11.305,33.401 11.296,33.451 11.268,33.493 10.797,33.963 10.797,39.443 11.611,40.257 25.779,40.257
GND on Internal Plane 1 (split plane): 32.765,52.689 33.451,52.529 34.132,52.349 34.807,52.152 35.477,51.936 36.141,51.702 36.799,51.451 37.449,51.181 38.092,50.895 38.726,50.59 39.353,50.269 39.97,49.931 40.578,49.576 41.176,49.205 41.764,48.818 42.342,48.415 42.908,47.997 43.462,47.563 44.005,47.115 44.535,46.652 45.053,46.175 45.557,45.684 46.048,45.18 46.525,44.662 46.988,44.132 47.436,43.589 47.87,43.035 48.288,42.469 48.691,41.891 49.078,41.303 49.449,40.705 49.804,40.097 50.142,39.48 50.463,38.853 50.768,38.219 51.054,37.576 51.324,36.926 51.575,36.268 51.809,35.604 52.025,34.934 52.222,34.259 52.402,33.578 52.562,32.892 52.692,32.26 42.928,32.26 42.928,38.481 42.919,38.531 42.891,38.573 42.383,39.081 42.341,39.109 42.291,39.118 31.879,39.118 31.879,40.767 31.879,47.571 32.604,48.295 32.632,48.337 32.641,48.387 32.641,52.715
NetQ5_5 on Internal Plane 1 (split plane): 22.223,29.645 21.917,29.339 11.484,29.339 10.924,29.899 10.924,32.256 22.223,32.256
P- on Internal Plane 1 (split plane): 190 vertices, not listed, extent 1.186,1.313 53.17,53.297
GND on Internal Plane 1 (split plane): 23.747,49.022 23.756,48.972 23.784,48.93 25.779,46.936 25.779,40.515 11.557,40.515 11.507,40.506 11.465,40.478 10.576,39.589 10.548,39.547 10.539,39.497 10.539,33.909 9.271,33.909 9.271,33.147 9.271,32.514 1.716,32.514 1.794,32.892 1.954,33.578 2.134,34.259 2.331,34.934 2.547,35.604 2.781,36.268 3.032,36.926 3.302,37.576 3.588,38.219 3.893,38.853 4.214,39.48 4.552,40.097 4.907,40.705 5.278,41.303 5.665,41.891 6.068,42.469 6.486,43.035 6.92,43.589 7.368,44.132 7.831,44.662 8.308,45.18 8.799,45.684 9.303,46.175 9.821,46.652 10.351,47.115 10.894,47.563 11.448,47.997 12.014,48.415 12.592,48.818 13.18,49.205 13.778,49.576 14.386,49.931 15.003,50.269 15.63,50.59 16.264,50.895 16.907,51.181 17.557,51.451 18.215,51.702 18.879,51.936 19.549,52.152 20.224,52.349 20.905,52.529 21.591,52.689 22.28,52.831 22.973,52.954 23.669,53.059 23.747,53.068
no net on Internal Plane 1 (split plane): 10.866,33.528

## Keep-outs
Keep-Out Layer:
  circle w0.254: c27.178,27.305 r26.5

## Other copper
Top Layer:
  rectangle net GND: 32.893,40.64 36.322,43.688
  rectangle net GND: 7.366,43.18 9.144,43.815
  rectangle net GND: 7.828,43.447 8.636,44.704
  rectangle net GND: 7.239,42.037 8.763,43.434
  rectangle net P-: 1.778,29.591 6.985,30.48
  rectangle net 3V7: 48.514,15.24 49.53,17.018
Signal Layer 1:
  region net IS: 36.068,38.608 32.385,38.608 32.385,33.274 36.068,33.274
  region net IS: 42.037,38.608 38.354,38.608 38.354,33.274 42.037,33.274
  rectangle net P-: 34.925,22.606 38.608,27.94
Bottom Layer:
  rectangle net NetQ21_1: 13.462,16.002 14.478,17.018
  rectangle net CELL4: 14.732,15.875 16.764,17.018
Internal Plane 1 (plane layer: these items are gaps in the copper):
  rectangle: 10.668,33.528 10.866,33.726
  rectangle: 9.271,33.147 10.668,33.909
  rectangle: 9.271,32.512 11.176,33.528
  lines w0.254: 1.1,32.084 1.401,32.385 15.287,32.385 23.368,32.385 25.908,34.925 25.908,46.99 23.876,49.022 23.876,53.34 ; 10.795,32.385 10.795,29.845 11.43,29.21 21.971,29.21 22.352,29.591 22.352,32.385 ; 11.176,32.512 11.176,33.401 10.668,33.909 10.668,39.497 11.557,40.386 25.908,40.386 ; 31.75,38.989 42.291,38.989 42.799,38.481 42.799,32.131 ; 32.512,53.34 32.512,48.387 31.75,47.625 31.75,40.767 31.75,33.02 32.639,32.131 36.195,32.131 53.086,32.131 ; 51.689,37.592 52.197,37.592

## Silkscreen, mask and mechanical layers (free items; w line width, h text height)
Top Overlay:
  lines w0.254: 31.75,2.032 33.147,2.032 33.528,2.413 ; 35.814,40.64 35.814,42.799 39.878,42.799 39.878,40.64 35.814,40.64
  text "P-" at 31.877,49.53 h2 r90
  text "BC" at 16.256,48.387 h2 r90
  text "烫烫屯" at 23.622,46.609 h2 r90
  text "Red35" at 37.084,43.434 h2.2 r90
  text "B-" at 8.001,41.529 h2 r90
  text "2Oz" at 36.449,41.148 h2
  text "3V7" at 45.847,40.64 h2
  text "1" at 50.165,36.068 h3
  text "4" at 2.286,32.893 h3
  text "16V8" at 25.146,31.623 h2
  text "T" at 9.271,30.988 h2
  text "P-" at 45.72,28.829 h2
  text "Prot" at 22.86,25.146 h2.2 r90
  text "Ultra" at 33.02,25.019 h2.2 r90
  text "P-" at 2.54,22.86 h2
  text "CH-" at 40.894,17.145 h2 r270
  text "3" at 7.493,13.081 h3 r90
  text "12V" at 12.319,8.382 h2 r270
  text "7V4" at 40.132,6.858 h2
  text "P-" at 29.972,5.588 h2
  text "2" at 30.226,1.651 h3
Bottom Overlay:
  circle w0.254: c27.178,27.305 r12.5
  region: 14.678,27.305 ccw(c27.178,27.305) 27.178,14.805 ccw(c27.178,27.305) 39.678,27.305 ccw(c27.178,27.305) 27.178,39.805 ccw(c27.178,27.305)
  text "DFEx-FloodMon3tr-BATPROT" at 39.243,12.446 h2
  text "V1.0a      2026/05/11" at 35.941,10.287 h2
  text "Designed by:" at 38.862,8.509 h2
  text "Redstoner_35" at 27.686,8.255 h3
Top Solder:
  region: 7.112,30.353 7.112,22.353 9.112,22.353 9.112,30.353
  rectangle: 16.65,48.273 19.15,50.773
  region: 14.351,47.894 14.351,40.894 18.351,40.894 18.351,47.894
  rectangle: 19.717,46.609 21.717,51.609
  region: 19.812,46.196 19.812,44.196 24.812,44.196 24.812,46.196
  region: 25.146,46.196 25.146,44.196 30.146,44.196 30.146,46.196
  region: 30.48,46.196 30.48,44.196 35.48,44.196 35.48,46.196
  rectangle: 40.64,20.098 42.64,22.098
  region: 50.307,21.717 43.307,21.717 43.307,17.717 50.307,17.717
  rectangle: 48.273,22.238 50.273,24.238
  rectangle: 4.585,22.365 6.585,24.365
  rectangle: 16.015,38.113 18.015,40.113
  rectangle: 35.827,38.113 37.827,40.113
  region: 38.227,40.1 38.227,38.1 42.227,38.1 42.227,40.1
  region: 11.303,40.1 11.303,38.1 15.303,38.1 15.303,40.1
  region: 47.339,26.416 45.339,26.416 45.339,22.416 47.339,22.416
  region: 30.876,37.973 23.876,37.973 23.876,33.973 30.876,33.973
  region: 39.893,22.098 32.893,22.098 32.893,18.098 39.893,18.098
  region: 10.81,22.098 3.81,22.098 3.81,18.098 10.81,18.098
  region: 21.844,22.034 11.844,22.034 11.844,18.034 21.844,18.034
  region: 32.385,22.034 22.385,22.034 22.385,18.034 32.385,18.034
Bottom Solder:
  rectangle: 38.735,34.163 41.91,39.116
  rectangle: 11.049,34.29 14.732,40.005
  region: 35.56,42.164 35.56,45.847 17.399,45.847 17.399,42.164
  rectangle: 7.874,17.653 11.43,27.432
  rectangle: 41.91,18.796 45.466,30.48